# Altium PCB pcb_v2.PcbDoc
Units mil, origin at the board's own origin, x right, y up, seen from the top; angles counter-clockwise.
Board outline 1050 x 1050 mil, 4 copper layers (Top Layer, Layer 1, Layer 2, Bottom Layer), stack 61.855 mil thick; 57 components, 65 nets, 223 pads, 109 vias.
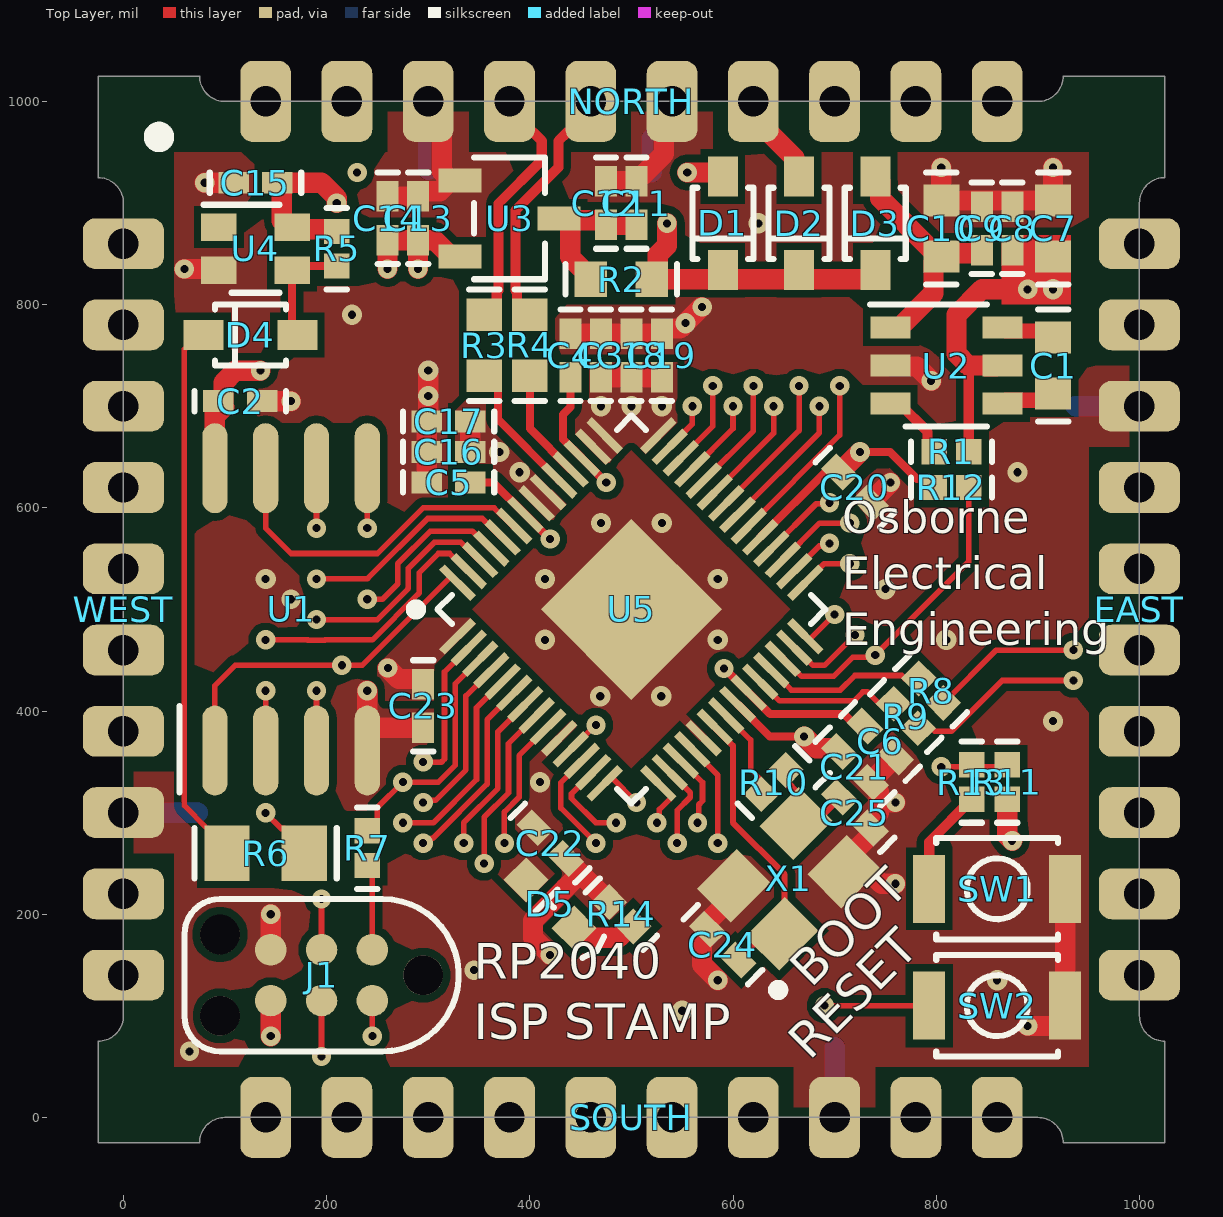
[diagram p0: Top Layer view]
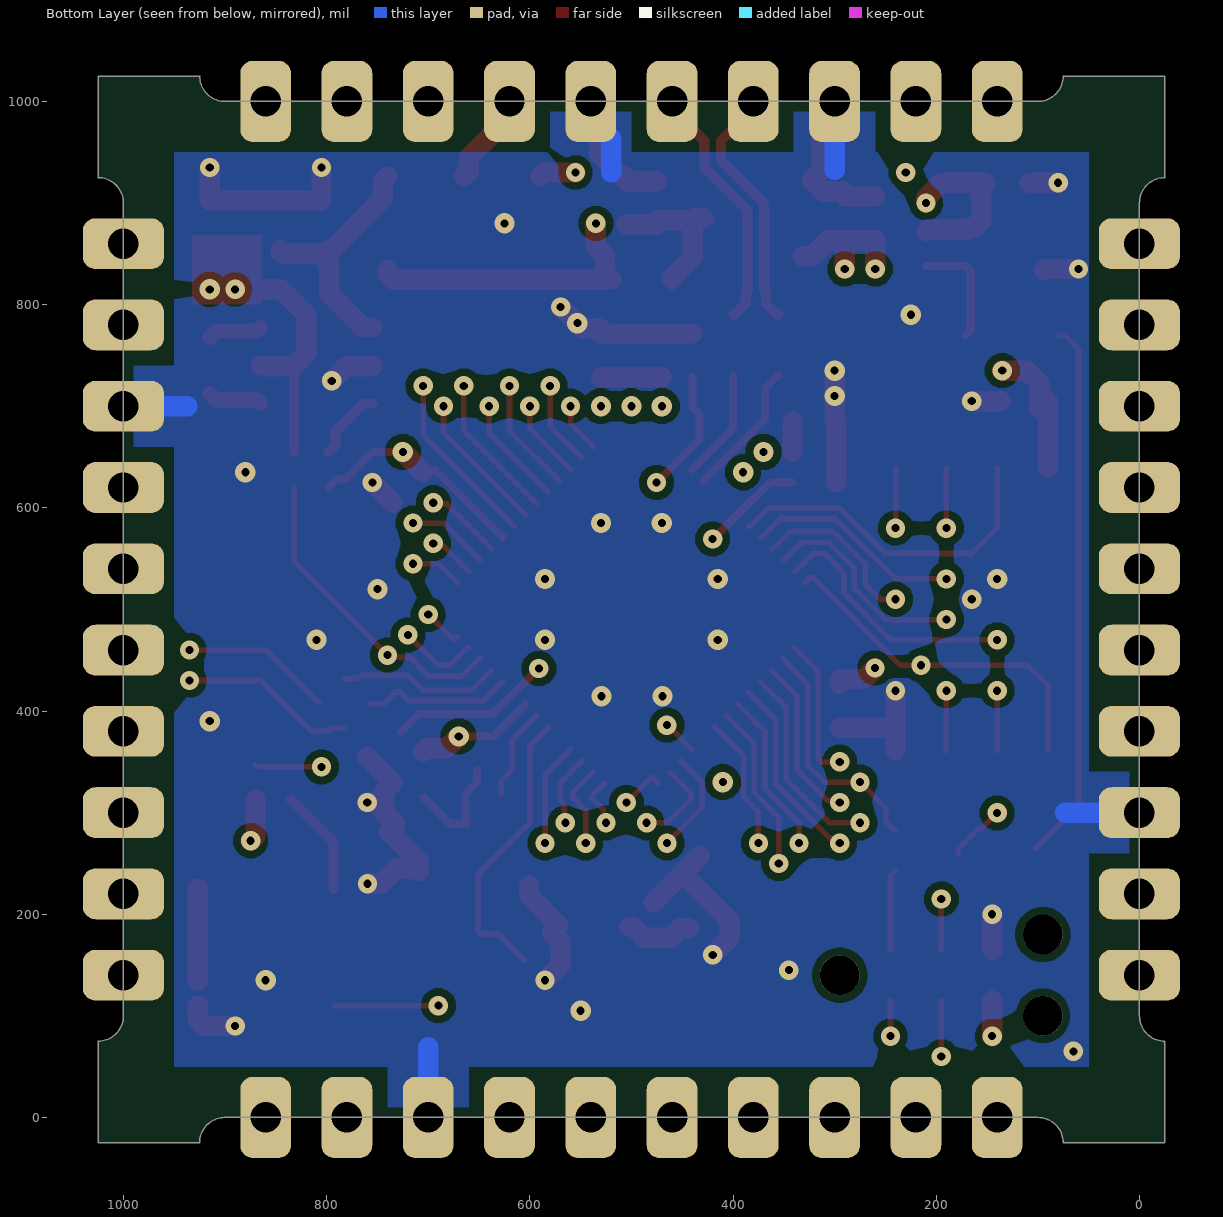
[diagram p1: Bottom Layer view, seen from below]
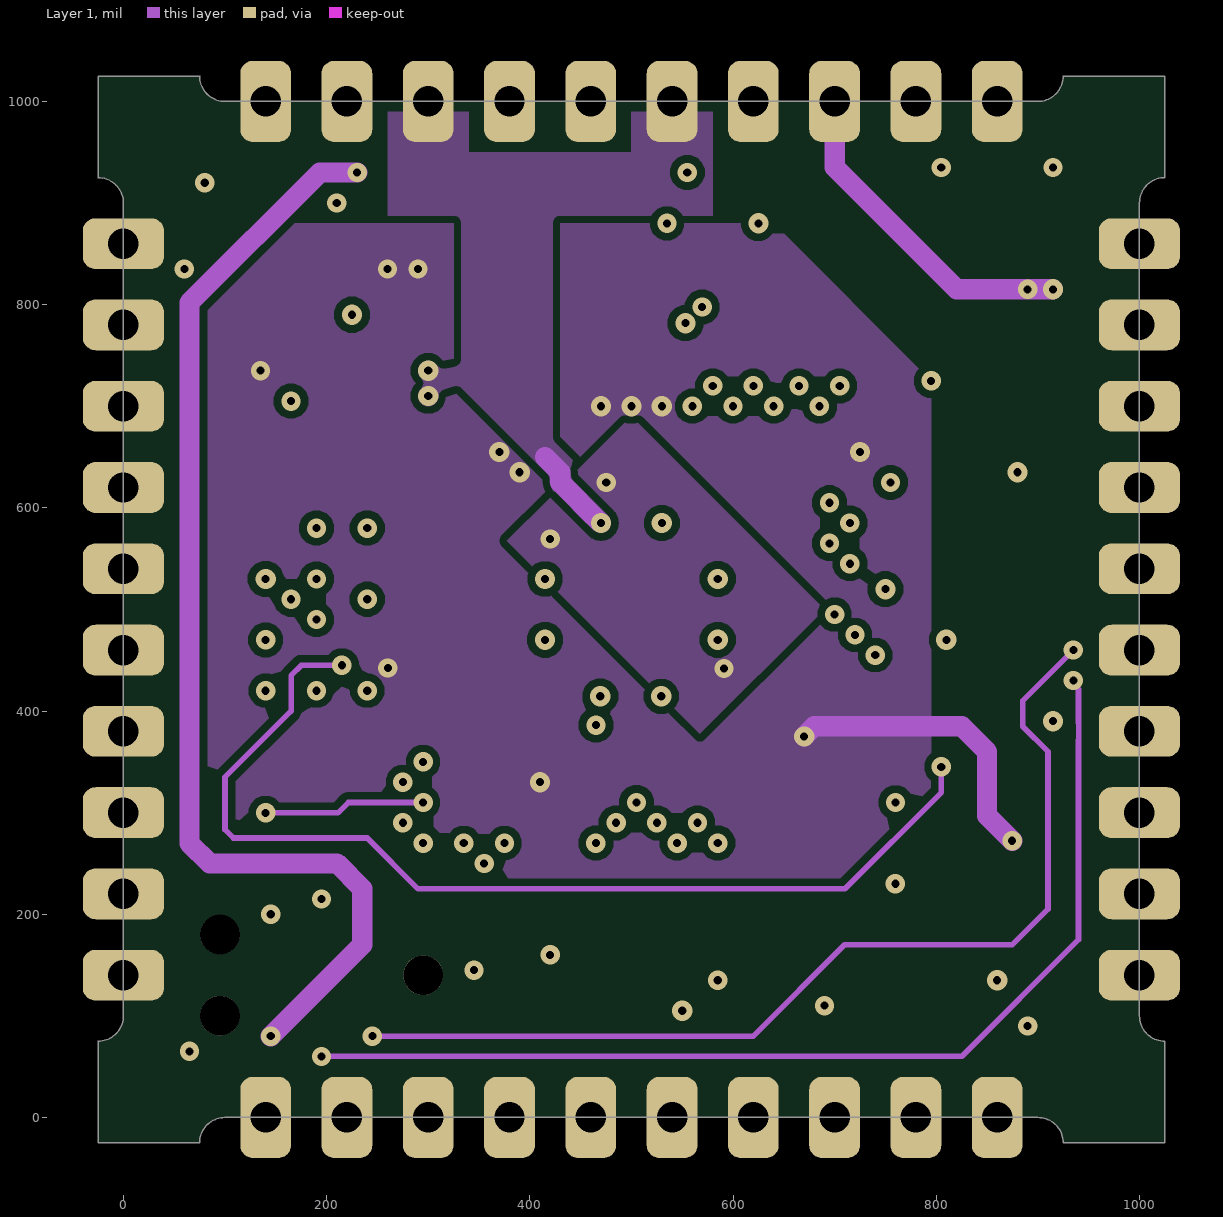
[diagram p2: Layer 1]
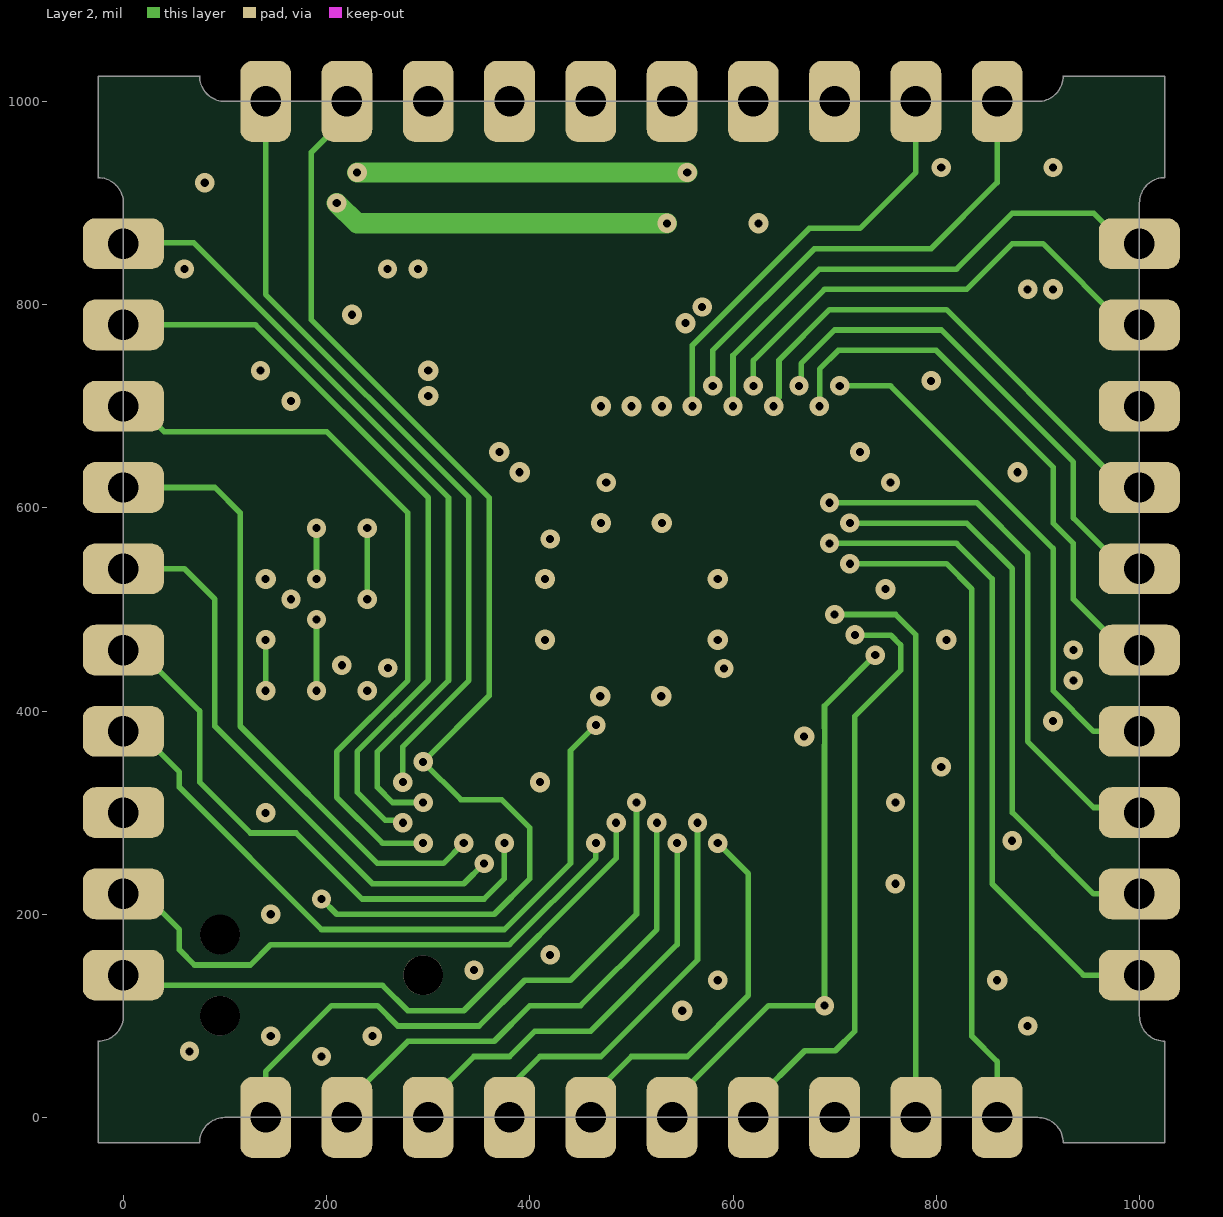
[diagram p3: Layer 2]
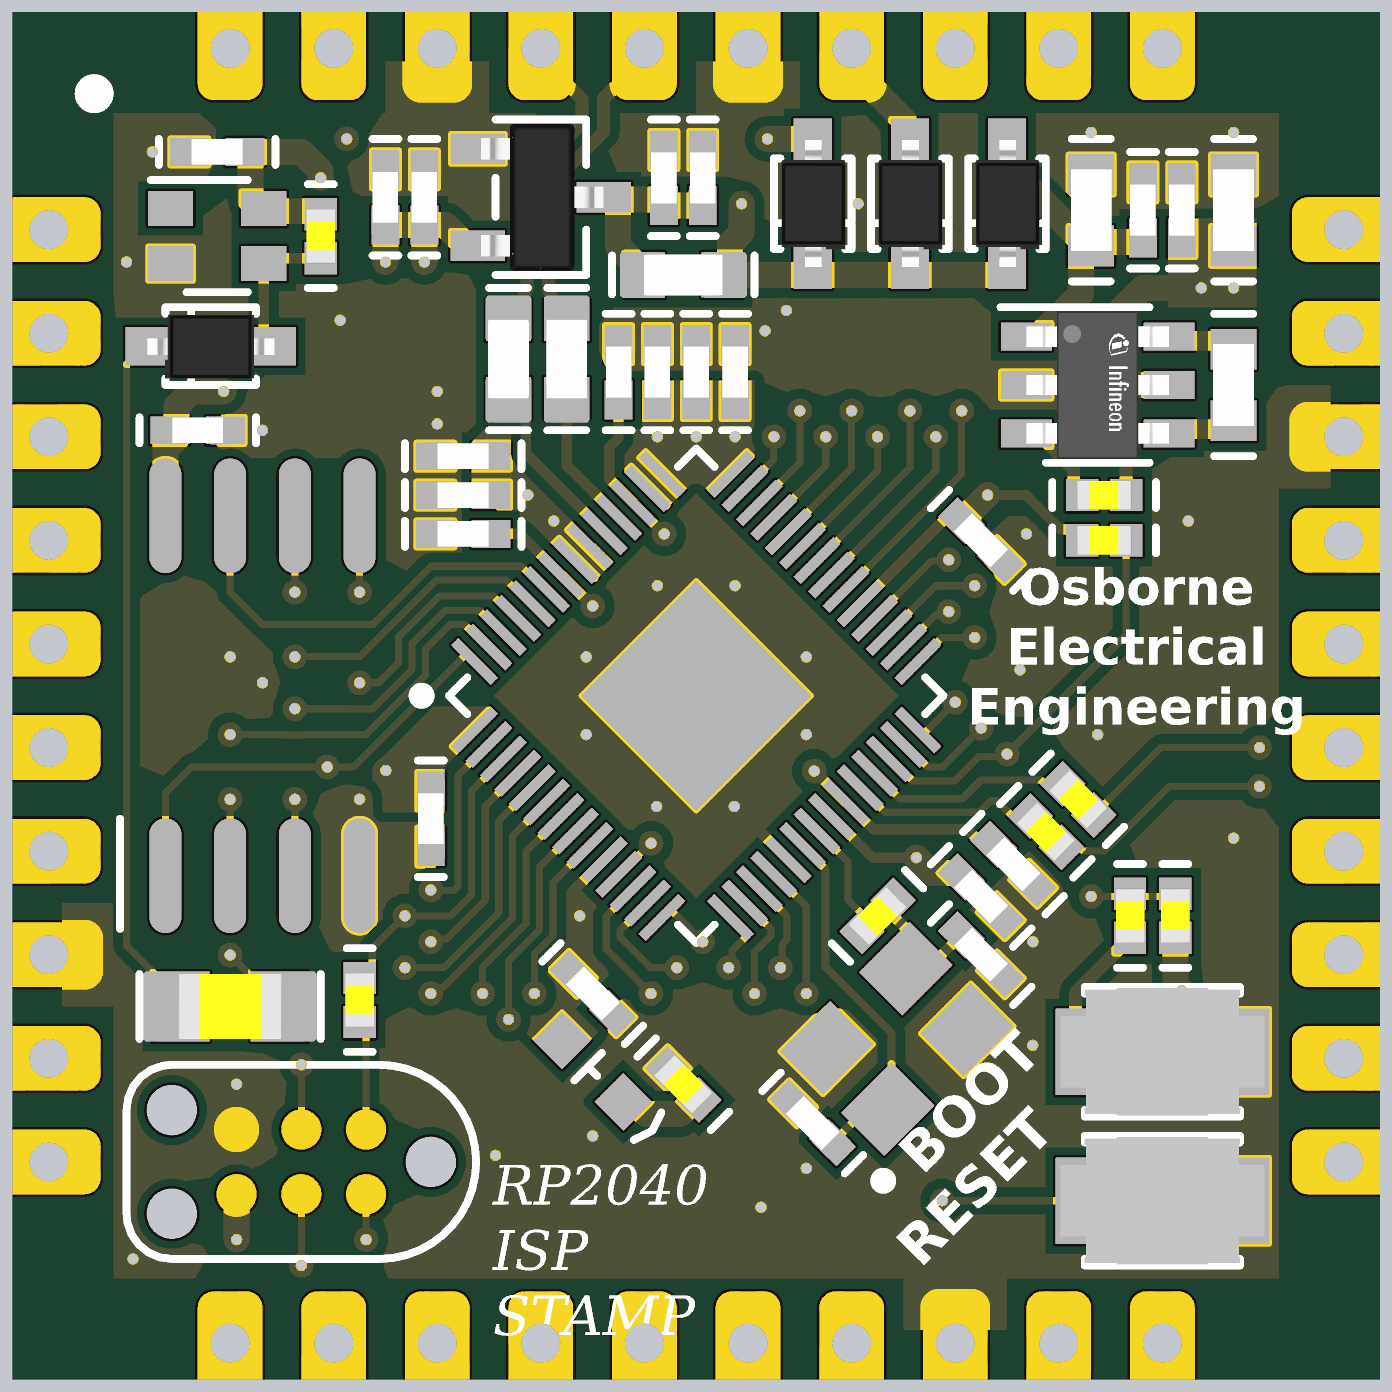
[diagram p4: 3D render of the assembled board from above, using the file's embedded part models]

## Layer stack, top to bottom
Top Solder: solder mask 0.5, Solder Resist, Dk 3.8
Top Layer: signal copper 1.4
Dielectric 2: prepreg 7.874, 7628, Dk 4.6
Layer 1: signal copper 0.689
Dielectric 1: core 41.9291, 7628, Dk 4.6
Layer 2: signal copper 0.689
Dielectric 3: prepreg 7.874, 7628, Dk 4.6
Bottom Layer: signal copper 1.4
Bottom Solder: solder mask 0.5, Solder Resist, Dk 3.8

## Board outline
-25,-25 -25,75 ccw(c-25,100) 0,100 0,900 ccw(c-25,900) -25,925 -25,1025 75,1025 ccw(c100,1025) 100,1000 900,1000 ccw(c900,1025) 925,1025 1025,1025 1025,925 ccw(c1025,900) 1000,900 1000,100 ccw(c1025,100) 1025,75 1025,-25 925,-25 ccw(c900,-25) 900,0 100,0 ccw(c100,-25) 75,-25

## Design rules (kind name [scope] priority, off if disabled: settings)
BoardOutlineClearance [Not HasFootprint('CASTELLATIONS')] p1: gap=10 ignorepadtopadclearanceinfootprint=FALSE except(0: Track-OutlineEdge)
Clearance [All] p1: gap=7.5 ignorepadtopadclearanceinfootprint=FALSE except(5: Arc-Arc Arc-Track Track-Track)
ComponentClearance [All] p1: gap=10 collisioncheckmode=3 verticalgap=100000 showdistances=TRUE donotcheckwithout3dbody=TRUE
DiffPairsRouting Netclass_90ohm [InDifferentialPairClass('90ohm')] p1: maxlimit=20 minlimit=6.5 mostfreqgap=20 toplayer_maxgap=6.5 toplayer_prefgap=6.5 toplayer_minwidth=10 toplayer_maxwidth=10 toplayer_prefwidth=10 midlayer2_mingap=9 midlayer2_maxgap=9 midlayer2_prefgap=9 midlayer2_minwidth=8 midlayer2_maxwidth=8 midlayer2_prefwidth=8 impedanceprofiledriven=TRUE impedanceprofileid={C649F7BD-3770-45B3-A50B-245186EF4A6F} impedanceprofilevalue=90.000000 maxuncoupledlength=500
DiffPairsRouting Default_DiffPair [All] p2: maxlimit=10 minlimit=10 mostfreqgap=10 toplayer_minwidth=15 toplayer_maxwidth=15 toplayer_prefwidth=15 midlayer1_minwidth=15 midlayer1_maxwidth=15 midlayer1_prefwidth=15 midlayer2_minwidth=15 midlayer2_maxwidth=15 midlayer2_prefwidth=15 bottomlayer_minwidth=15 bottomlayer_maxwidth=15 bottomlayer_prefwidth=15 maxuncoupledlength=500
HoleSize [All] p1: absolutevalues=TRUE maxlimit=200 minlimit=8 maxpercent=80.000 minpercent=20.000
MinimumAnnularRing [All] p1: minimumring=5.5
MinimumSolderMaskSliver [All] p1: minsoldermaskwidth=3.94
PolygonConnect [All] p1: connectstyle=Direct reliefconductorwidth=20 reliefentries=4 polygonreliefangle="90 Angle" airgapwidth=10
RoutingVias [All] p1: holewidth=8 width=20 viastyle="Through Hole" minholewidth=8 minwidth=19 maxholewidth=35 maxwidth=70
SilkToSilkClearance [All] p1: silktosilkclearance=4
SilkToSolderMaskClearance [IsPad] p1: minsilkscreentomaskgap=3.5 clearancetoexposedcopper=FALSE
SolderMaskExpansion [All] p1: expansion=1.97 istentingtop=FALSE
UnRoutedNet [All] p1: checkbadconnections=TRUE
Width Default_Width [All] p1: maxlimit=100 minlimit=3.5 preferedwidth=10
23 further rules are at their usual default settings.

## Classes and differential pairs
differential pair class 90ohm: USB_EXT
differential pair USB_EXT: +USB_EXT_P -USB_EXT_N

## Components (designator, comment, footprint, x,y, rotation, side; value= is the part's Value field where it differs from the comment)
C1 "2.2uF" C0603 915,740 r270 top
C2 "100nF" C0402 115,705 r180 top
C3 "1uF" C0402 470,750 r270 top
C4 "1uF" C0402 440,750 r270 top
C5 "100nF" C0402 320,625 r0 top
C6 "100nF" C0402 745,370 r135 top
C7 "10uF" C0603 915,875 r270 top
C8 "100nF" C0402 875,875 r270 top
C9 "100nF" C0402 845,875 r270 top
C10 "10uF" C0603 805,875 r270 top
C11 "1uF" C0402 505,900 r270 top
C12 "100nF" C0402 475,900 r270 top
C13 "100nF" C0402 290,885 r270 top
C14 "1uF" C0402 260,885 r270 top
C15 "100nF" C0402 130,920 r0 top
C16 "100nF" C0402 320,655 r0 top
C17 "100nF" C0402 320,685 r0 top
C18 "100nF" C0402 500,750 r270 top
C19 "100nF" C0402 530,750 r270 top
C20 "100nF" C0402 720,620 r135 top
C21 "100nF" C0402 720,345 r135 top
C22 "100nF" C0402 420,270 r135 top
C23 "100nF" C0402 295,405 r90 top
C24 "33pF" C0402 590,170 r315 top
C25 "33pF" C0402 720,300 r135 top
D1 "1N5819WS" SOD-323_L1.8-W1.3-LS2.5-RD 590,880 r90 top
D2 "1N5819WS" SOD-323_L1.8-W1.3-LS2.5-RD 665,880 r90 top
D3 "1N5819WS" SOD-323_L1.8-W1.3-LS2.5-RD 740,880 r90 top
D4 "1N4148WS T4" SOD-323_L1.8-W1.3-LS2.5-RD 125,770 r0 top
D5 "19-217/GHC-YR1S2/3T" LED0603-R-RD 420,210 r135 top
EAST "STAMPEDGE" CASTELLATIONS 1000,500 r270 top locked
J1 "TC2030-IDC-NL" TC2030-IDC-NL 295,140 r180 top
NORTH "STAMPEDGE" CASTELLATIONS 500,1000 r0 top locked
R1 "10kΩ" R0402 815,655 r0 top
R2 "2.2Ω" R0603 490,825 r180 top
R3 "27Ω" R0603 355,760 r90 top
R4 "27Ω" R0603 400,760 r90 top
R5 "10kΩ" R0402 210,855 r90 top
R6 "0Ω" R0805 140,260 r0 top
R7 "100Ω" R0402 240,265 r270 top
R8 "100Ω" R0402 795,420 r315 top
R9 "100Ω" R0402 770,395 r315 top
R10 "1kΩ" R0402 640,330 r45 top
R11 "10kΩ" R0402 870,330 r270 top
R12 "10kΩ" R0402 815,620 r180 top
R13 "1kΩ" R0402 835,330 r90 top
R14 "220Ω" R0402 490,200 r315 top
SOUTH "STAMPEDGE" CASTELLATIONS 500,0 r180 top locked
SW1 "B3U-1000P" KEY-SMD_B3U-1000PM 860,225 r180 top
SW2 "B3U-1000P" KEY-SMD_B3U-1000PM 860,110 r180 top
U1 "W25Q128JVSIQTR" SOIC-8_L5.3-W5.3-P1.27-LS8.0-BL 165,500 r0 top locked
U2 "HX4002" SOT-23-6_L2.9-W1.6-P0.95-LS2.8-BR 810,740 r180 top
U3 "XC6206P332MR" SOT-23-3_L2.9-W1.6-P1.90-LS2.8-BR 380,885 r180 top
U4 "WS2812B-2020" LED-SMD_4P-L2.0-W2.0-TL_WS2812B-2020 130,855 r0 top
U5 "RP2040" LQFN-56_L7.0-W7.0-P0.4-EP 500,500 r45 top locked
WEST "STAMPEDGE" CASTELLATIONS 0,500 r90 top locked
X1 "12MHz" OSC-SMD_4P-L3.2-W2.5-BL 655,235 r45 top

## Footprints (in the part's own frame and the unit in brackets; to place one, negate y for a bottom-side part, rotate by r counter-clockwise, add the part's x,y. Pads: shape width x height; smd on the part's side, far side on the other; paste and mask are expansions set on the pad)
C0402 [mil]
  rect 30x21.5 smd: 1(-21.5,0) 2(21.5,0)
  silkscreen extent -45,-10 45,10, body extent -20,-10 20,10, height 5
C0603 [mm]
  rect 0.8x0.9 smd: 1(-0.7,0) 2(0.7,0)
  silkscreen extent -1.4,-0.38 1.4,0.38, body extent -0.8,-0.4 0.8,0.4, height 0.8
CASTELLATIONS [mil]
  rrect50% 50x80 hole 30 paste-100: 1(-360,0) 2(-280,0) 3(-200,0) 4(-120,0) 5(-40,0) 6(40,0) 7(120,0) 8(200,0) 9(280,0) 10(360,0)
KEY-SMD_B3U-1000PM [mm]
  rect 0.8x1.7 smd: 1(-1.7,0) 2(1.7,0)
  silkscreen extent -1.52,-1.27 1.52,1.27, body extent -2,-1.25 2,1.25, height 1.6
LED0603-R-RD [mm]
  rect 0.8x0.8 smd: 1(0.851,0) 2(-0.851,0)
  silkscreen extent -1.65,-0.38 0.13,0.38
LED-SMD_4P-L2.0-W2.0-TL_WS2812B-2020 [mil]
  rect 35x27 smd: 1(-36,21.3) 2(-36,-21.3) 3(36,-21.3) 4(36,21.3)
  silkscreen extent -51,-43 24,43, body extent -43,-39 43,39, height 33
LQFN-56_L7.0-W7.0-P0.4-EP [mm]
  rect 1.1x0.2 smd: 1(-3.55,2.6) 2(-3.55,2.2) 3(-3.55,1.8) 4(-3.55,1.4) 5(-3.55,1) 6(-3.55,0.6) 7(-3.55,0.2) 8(-3.55,-0.2) 9(-3.55,-0.6) 10(-3.55,-1) 11(-3.55,-1.4) 12(-3.55,-1.8) 13(-3.55,-2.2) 14(-3.55,-2.6) 29(3.55,-2.6) 30(3.55,-2.2) 31(3.55,-1.8) 32(3.55,-1.4) 33(3.55,-1) 34(3.55,-0.6) 35(3.55,-0.2) 36(3.55,0.2) 37(3.55,0.6) 38(3.55,1) 39(3.55,1.4) 40(3.55,1.8) 41(3.55,2.2) 42(3.55,2.6)
  rect 0.2x1.1 smd: 15(-2.6,-3.55) 16(-2.2,-3.55) 17(-1.8,-3.55) 18(-1.4,-3.55) 19(-1,-3.55) 20(-0.6,-3.55) 21(-0.2,-3.55) 22(0.2,-3.55) 23(0.6,-3.55) 24(1,-3.55) 25(1.4,-3.55) 26(1.8,-3.55) 27(2.2,-3.55) 28(2.6,-3.55) 43(2.6,3.55) 44(2.2,3.55) 45(1.8,3.55) 46(1.4,3.55) 47(1,3.55) 48(0.6,3.55) 49(0.2,3.55) 50(-0.2,3.55) 51(-0.6,3.55) 52(-1,3.55) 53(-1.4,3.55) 54(-1.8,3.55) 55(-2.2,3.55) 56(-2.6,3.55)
  rect 3.2x3.2 smd: 57(0,0)
  silkscreen extent -3.94,-3.43 3.43,3.94, body extent -3.5,-3.5 3.5,3.5, height 0.9
OSC-SMD_4P-L3.2-W2.5-BL [mm]
  rect 1.4x1.2 smd: 1(-1.1,-0.85) 2(1.1,-0.85) 3(1.1,0.85) 4(-1.1,0.85)
  silkscreen extent -2.29,-1.9 -2.03,-1.65, body extent -1.6,-1.3 1.6,1.3, height 0.76
R0402 [mil]
  rect 25x25 smd: 1(-17,0) 2(17,0)
  silkscreen extent -40,-10 40,10, body extent -21,-11 21,11, height 19
R0603 [mil]
  rect 32x35 smd: 1(-30,0) 2(30,0)
  silkscreen extent -55,-15 55,15, body extent -31,-16 31,16, height 19
R0805 [mil]
  rect 44.59x54.21 smd: 1(-38.04,0) 2(38.04,0)
  silkscreen extent -70,-25 70,25, body extent -40,-25 40,25, height 19
SOD-323_L1.8-W1.3-LS2.5-RD [mm]
  rect 1x0.75 smd: 1(-1.173,0) 2(1.173,0)
  silkscreen extent -0.89,-0.76 0.89,0.76, body extent -1.24,-0.64 1.25,0.61, height 0.88
SOIC-8_L5.3-W5.3-P1.27-LS8.0-BL [mm]
  oval 0.63x2.25 smd: 1(-1.905,-3.53) 2(-0.635,-3.53) 3(0.635,-3.53) 4(1.905,-3.53) 5(1.905,3.53) 6(0.635,3.53) 7(-0.635,3.53) 8(-1.905,3.53)
  silkscreen extent -2.79,-4.57 -2.79,-2.41, body extent -2.67,-2.29 2.64,2.29, height 2.16
SOT-23-3_L2.9-W1.6-P1.90-LS2.8-BR [mm]
  rect 1.07x0.6 smd: 1(1.235,-0.95) 2(1.235,0.95) 3(-1.235,0)
  silkscreen extent -0.89,-1.52 0.89,1.52, body extent -1.23,-1.45 1.17,1.45, height 0.96
SOT-23-6_L2.9-W1.6-P0.95-LS2.8-BR [mm]
  rect 1x0.55 smd: 1(1.4,-0.95) 2(1.4,0) 3(1.4,0.95) 4(-1.4,0.95) 5(-1.4,0) 6(-1.4,-0.95)
  silkscreen extent -1.02,-1.52 1.91,1.52, body extent -1.4,-1.45 1.4,1.45, height 1.26
TC2030-IDC-NL [mil] "Tag Connect 6-Pin No Legs"
  round 38.9 hole 39 unplated: 0(0,0) 0(200,-40) 0(200,40)
  round 31 smd paste-100: 1(50,-25) 2(50,25) 3(100,-25) 4(100,25) 5(150,-25) 6(150,25)
  silkscreen extent -35,-75 235,75

## Part data
C1: "16V 2.2uF X5R ±10% 0603  Multilayer Ceramic Capacitors MLCC - SMD/SMT ROHS", BOM_JLCPCB Part Class="Basic Part", BOM_Manufacturer=SAMSUNG, BOM_Manufacturer Part=CL10A225KO8NNNC, BOM_Supplier=LCSC, BOM_Supplier Part=C23630, nameAlias=Capacitance, spicePre=C, spiceSymbolName=CL10A225KO8NNNC
C2 C5 C6 C8 C9 C12 C13 C15 C16 C17 C18 C19 C20 C21 C22 C23: "16V 100nF X7R ±10% 0402  Multilayer Ceramic Capacitors MLCC - SMD/SMT ROHS", BOM_JLCPCB Part Class="Basic Part", BOM_Manufacturer=SAMSUNG, BOM_Manufacturer Part=CL05B104KO5NNNC, BOM_Supplier=LCSC, BOM_Supplier Part=C1525, nameAlias=Capacitance, spicePre=C, spiceSymbolName=CL05B104KO5NNNC
C3 C4 C11 C14: "25V 1uF X5R ±10% 0402  Multilayer Ceramic Capacitors MLCC - SMD/SMT ROHS", BOM_JLCPCB Part Class="Basic Part", BOM_Manufacturer=SAMSUNG, BOM_Manufacturer Part=CL05A105KA5NQNC, BOM_Supplier=LCSC, BOM_Supplier Part=C52923, nameAlias=Capacitance, spicePre=C, spiceSymbolName=CL05A105KA5NQNC
C7 C10: "X5R 25V ±20% 10uF 0603 Multilayer Ceramic Capacitors MLCC - SMD/SMT ROHS", BOM_JLCPCB Part Class="Basic Part", BOM_Manufacturer=SAMSUNG, BOM_Manufacturer Part=CL10A106MA8NRNC, BOM_Supplier=LCSC, BOM_Supplier Part=C96446, nameAlias=Capacitance, spicePre=C, spiceSymbolName=CL10A106MA8NRNC
C24 C25: "50V 33pF C0G ±5% 0402  Multilayer Ceramic Capacitors MLCC - SMD/SMT ROHS", BOM_JLCPCB Part Class="Basic Part", BOM_Manufacturer=FH, BOM_Manufacturer Part=0402CG330J500NT, BOM_Supplier=LCSC, BOM_Supplier Part=C1562, nameAlias=Capacitance, spicePre=C, spiceSymbolName=0402CG330J500NT
D1 D2 D3: "40V 600mV@1A 1A SOD-323  Schottky Barrier Diodes (SBD) ROHS", BOM_JLCPCB Part Class="Basic Part", BOM_Manufacturer="Guangdong Hottech", BOM_Manufacturer Part=1N5819WS, BOM_Supplier=LCSC, BOM_Supplier Part=C191023, Contributor=LCSC, spicePre=D, spiceSymbolName=1N5819WS
D4: "100V +150℃@(Tj) 200mW Single 1.25V@150mA 4ns 1μA@75V 150mA SOD-323  Switching Diode ROHS", BOM_JLCPCB Part Class="Basic Part", BOM_Manufacturer=CJ, BOM_Manufacturer Part="1N4148WS T4", BOM_Supplier=LCSC, BOM_Supplier Part=C2128, spicePre=D, spiceSymbolName="1N4148WS T4"
D5: "20mA 285mcd 3.3V 518nm Colorless transparence -40℃~+85℃ 520nm~535nm Emerald 120° 110mW 0603  Light Emitting Diodes (LED) ROHS", BOM_JLCPCB Part Class="Basic Part", BOM_Manufacturer=EVERLIGHT, BOM_Manufacturer Part=19-217/GHC-YR1S2/3T, BOM_Supplier=LCSC, BOM_Supplier Part=C72043, spicePre=L, spiceSymbolName=19-217/GHC-YR1S2/3T
EAST NORTH SOUTH WEST: "RP2040 ISP Stamp Castellations"
J1: "Tag-Connect 6-Pin No Legs"
R1 R5 R11 R12: "1/16W Thick Film Resistors 50V ±1% ±100ppm/℃ -55℃~+155℃ 10kΩ 0402  Chip Resistor - Surface Mount ROHS", BOM_JLCPCB Part Class="Basic Part", BOM_Manufacturer=UniOhm, BOM_Manufacturer Part=0402WGF1002TCE, Resistance (Ohms)=10K, BOM_Supplier=LCSC, BOM_Supplier Part=C25744, nameAlias=Resistance, spicePre=R, spiceSymbolName=0402WGF1002TCE
R2: "1/10W Thick Film Resistors 75V ±1% ±400ppm/℃ -55℃~+155℃ 2.2Ω 0603  Chip Resistor - Surface Mount ROHS", BOM_JLCPCB Part Class="Basic Part", BOM_Manufacturer=UniOhm, BOM_Manufacturer Part=0603WAF220KT5E, Resistance (Ohms)=2.2, BOM_Supplier=LCSC, BOM_Supplier Part=C22939, nameAlias=Resistance, spicePre=R, spiceSymbolName=0603WAF220KT5E
R3 R4: "1/10W Thick Film Resistors 75V ±1% ±200ppm/℃ -55℃~+155℃ 27Ω 0603  Chip Resistor - Surface Mount ROHS", BOM_JLCPCB Part Class="Basic Part", BOM_Manufacturer=UniOhm, BOM_Manufacturer Part=0603WAF270JT5E, Resistance (Ohms)=27, BOM_Supplier=LCSC, BOM_Supplier Part=C25190, nameAlias=Resistance, spicePre=R, spiceSymbolName=0603WAF270JT5E
R6: "125mW Thick Film Resistors 150V ±1% ±800ppm/℃ -55℃~+155℃ 0mΩ 0805  Chip Resistor - Surface Mount ROHS", BOM_JLCPCB Part Class="Basic Part", BOM_Manufacturer=UniOhm, BOM_Manufacturer Part=0805W8F0000T5E, Resistance (Ohms)=0, BOM_Supplier=LCSC, BOM_Supplier Part=C17477, nameAlias=Resistance, spicePre=R, spiceSymbolName=0805W8F0000T5E
R7 R8 R9: "1/16W Thick Film Resistors 50V ±1% ±200ppm/℃ -55℃~+155℃ 100Ω 0402  Chip Resistor - Surface Mount ROHS", BOM_JLCPCB Part Class="Basic Part", BOM_Manufacturer=UniOhm, BOM_Manufacturer Part=0402WGF1000TCE, Resistance (Ohms)=100, BOM_Supplier=LCSC, BOM_Supplier Part=C25076, nameAlias=Resistance, spicePre=R, spiceSymbolName=0402WGF1000TCE
R10 R13: "1/16W Thick Film Resistors 50V ±1% ±100ppm/℃ -55℃~+155℃ 1kΩ 0402  Chip Resistor - Surface Mount ROHS", BOM_JLCPCB Part Class="Basic Part", BOM_Manufacturer=UniOhm, BOM_Manufacturer Part=0402WGF1001TCE, Resistance (Ohms)=1K, BOM_Supplier=LCSC, BOM_Supplier Part=C11702, nameAlias=Resistance, spicePre=R, spiceSymbolName=0402WGF1001TCE
R14: "1/16W Thick Film Resistors 50V ±1% ±100ppm/℃ -55℃~+155℃ 220Ω 0402  Chip Resistor - Surface Mount ROHS", BOM_JLCPCB Part Class="Basic Part", BOM_Manufacturer=UniOhm, BOM_Manufacturer Part=0402WGF2200TCE, Resistance (Ohms)=220, BOM_Supplier=LCSC, BOM_Supplier Part=C25091, nameAlias=Resistance, spicePre=R, spiceSymbolName=0402WGF2200TCE
SW1 SW2: "2.5mm 1.6mm Round Button 50mA Brick nogging 3mm SPST 12V SMD,3x2.5x1.6mm  Tactile Switches ROHS", BOM_JLCPCB Part Class="Extended Part", BOM_Manufacturer="Omron Electronics", BOM_Manufacturer Part=B3U-1000P, BOM_Supplier=LCSC, BOM_Supplier Part=C231329, Contributor=LCSC, spicePre=S, spiceSymbolName=B3U-1000P
U1: "SOIC-8_208mil  NOR FLASH ROHS", BOM_JLCPCB Part Class="Basic Part", BOM_Manufacturer=WINBOND, BOM_Manufacturer Part=W25Q128JVSIQTR, BOM_Supplier=LCSC, BOM_Supplier Part=C97521, spicePre=U, spiceSymbolName=W25Q128JVSIQTR
U2: "NO Charge pump 1 5V 2.7V~5.5V 250mA 1.2MHz SOT-23-6  DC-DC Converters ROHS", BOM_JLCPCB Part Class="Extended Part", BOM_Manufacturer=HEXIN, BOM_Manufacturer Part=HX4002, BOM_Supplier=LCSC, BOM_Supplier Part=C172354, Contributor=LCSC, spicePre=U, spiceSymbolName=HX4002
U3: "200mA 680mV@(100mA) Fixed 3.3V~3.3V Positive 1 6V SOT-23-3L  Linear Voltage Regulators (LDO) ROHS", BOM_JLCPCB Part Class="Basic Part", BOM_Manufacturer=TOREX, BOM_Manufacturer Part=XC6206P332MR, BOM_Supplier=LCSC, BOM_Supplier Part=C5446, spicePre=U, spiceSymbolName=XC6206P332MR
U4: "5mA 5.3V -25℃~+85℃ RGB SMD,2x2mm  Light Emitting Diodes (LED) ROHS", BOM_JLCPCB Part Class="Extended Part", BOM_Manufacturer=Worldsemi, BOM_Manufacturer Part=WS2812B-2020, BOM_Supplier=LCSC, BOM_Supplier Part=C965555, Contributor=LCSC, spicePre=L, spiceSymbolName=WS2812B-2020
U5: "ARM Cortex-M0 1@x4ch/12bit USB Host/Device 2 264KB 2 133MHz 30 2 QFN-56(7x7)  Microcontroller Units (MCUs/MPUs/SOCs) ROHS", BOM_JLCPCB Part Class="Extended Part", BOM_Manufacturer="Raspberry Pi(树莓派)", BOM_Manufacturer Part=RP2040, BOM_Supplier=LCSC, BOM_Supplier Part=C2040, Contributor=LCSC, spicePre=U, spiceSymbolName=RP2040
X1: "12MHz SMD Crystal Resonator 20pF ±10ppm ±30ppm -40℃~+85℃ SMD3225-4P  Crystals ROHS", BOM_JLCPCB Part Class="Basic Part", BOM_Manufacturer=YXC, BOM_Manufacturer Part=X322512MSB4SI, BOM_Supplier=LCSC, BOM_Supplier Part=C9002, nameAlias=Frequency, spicePre=X, spiceSymbolName=X322512MSB4SI

## Via types
v1: diameter 19, hole 8, Top Layer to Bottom Layer, tented both sides, 80 vias
v2: diameter 20, hole 8, Top Layer to Bottom Layer, tented both sides, 29 vias

## Nets (pads, with @x,y where several pads share a name; then routed paths per layer and width w, separated by ;. In a path a pad name is that pad's centre, name@x,y a point inside that pad or via, vN(x,y) a via of type N, cw(c..) or ccw(c..) an arc to the next point about the centre after c; other vN are vias at no path point)
1V1: C4.2 C5.2 C6.2 U5.23 U5.45 U5.50 | length 387.5
  Top Layer w8: C5.2 363.86,625 U5.50 395.69,593.26 419.64,569.32 v1(420.03,569.32) ; C4.2 440,699.08 432.82,691.9 432.82,667.49 451.28,649.03 U5.45 ; U5.45@450.09,650 475.11,624.98 v1(475.24,624.98) ; v1@591.5,441.82 U5.23@615.44,417.88 ; U5.23 615.62,417.88 636.58,396.91 709.3,396.91 C6.2@726.21,380
  other v1: 591.1,441.82
3V3: C2.2 C3.2 C13.2 C14.2 C16.2 C17.2 C18.2 C19.2 C20.2 C21.2 C22.2 C23.2 D5.1 R11.2 R12.2 U1.8 U3.2 U5.1 U5.10 U5.22 U5.33 U5.42 U5.43 U5.44 U5.48 U5.49 | length 1079.7
  Top Layer w8: U5.22 636.14,375 v2(670,375) ; U5.33 C20.2@693.07,637.39 ; v2(725,655) 754.7,655 781.2,628.5 789.5,628.5 R12.2
  Top Layer w20: U1.8 90,690 ; C2.2@99.25,699.25 90,690 ; v1(135,735) 110.22,735 98.5,723.28 98.5,705.75 97.75,705 C2.2 90.75,705 90,704.25 90,690 ; v1(260,835) C14.2 C13.2 ; v1(260.25,442.32) 271.07,431.5 294.25,431.5 295,430.75 C23.2 ; v1(290,835) C13.2 ; U3.2 322.13,847.6 306.23,863.5 C13.2 ; C16.2 C17.2 ; C3.2 C18.2 C19.2 ; v2(670,375) 681.79,363.21 701.79,363.21 C21.2 ; C20.2 705.2,635.2 v2(725,655) ; R11.2 870,277.07 v1(874.75,272.32)
  Layer 1 w20: v2(670,375) 680,385 825,385 850,360 850,297.07 v1(874.75,272.32)
  other v2: 410,330 390,635 370,655 470,700 500,700 530,700
3V3_EXT: C7.2 C8.2 NORTH.8 R1.2 U2.5 | length 602.8
  Top Layer w10: R1.2 832,740 ; U2.5@848.5,734.17 859.3,734.17 U2.5
  Top Layer w20: U2.5 832,740 831.73,740 820.02,751.71 820.02,790.02 845,815 v1(890,815) v1@890.44,815
  Layer 1 w20: NORTH.8 700,935 820,815 v1(890,815) v2(915,815)
5V: C15.2 D1.1 D2.1 D3.1 R2.1 R5.2 U4.4 | length 786.6
  Top Layer w20: C15.2 C15.2@155,920 ; R5.2 207.85,874.15 168.15,874.15 U4.4 162,876.3 155.75,882.55 155.75,919.25 C15.2@155,920 ; v1(210,900) 210,905 195,920 C15.2@155,920 ; v1(535,880) 535,858 526,849 526,831 R2.1 735.24,825 740,829.76 D3.1
  Layer 2 w20: v1(210,900) 230,880 v1(535,880)
5V_DBG: D1.2 J1.6 | length 1517.6
  Top Layer w20: v1(145,80) J1.6 ; v1(555,930) 586.16,930 D1.2
  Layer 1 w20: v1(145,80) 235,170 235,225.28 210.28,250 85,250 65,270 65,801.82 193.18,930 v1(230,930)
  Layer 2 w20: v1(230,930) v1(555,930)
5V_EXT: D2.2 NORTH.7 | length 92.5
  Top Layer w20: NORTH.7 620,985 660.24,944.76 660.24,930.93 D2.2
GND: C2.1 C3.1 C4.1 C5.1 C6.1 C7.1 C8.1 C9.1 C10.1 C11.1 C12.1 C13.1 C14.1 C15.1 C16.1 C17.1 C18.1 C19.1 C20.1 C21.1 C22.1 C23.1 C24.1 C25.1 EAST.3 J1.5 NORTH.3 NORTH.6 R14.1 SOUTH.3 SW1.1 SW2.1 U1.4 U2.2 U3.1 U4.2 U5.19 U5.57 WEST.3 X1.2 X1.4 | length 2133
  Top Layer w20: v1(60,835) 92.7,835 U4.2 ; v1(80,920) C15.1 ; C2.1 v1(165,705) ; J1.5 v1(145,200) ; U1.4 U1.4@240,381.28 ; v1(240,420) U1.4@240,381.28 ; C14.1 C13.1 290,910.75 290.75,911.5 311.23,911.5 U3.1@322.13,922.4 ; C23.1 242.22,383.5 U1.4@240,381.28 ; C5.1 C16.1 C17.1 299.25,685 300,685.75 v2(300,710) v2(300,735) ; NORTH.3 313.46,986.54 313.46,931.08 U3.1@322.13,922.4 ; U3.1@320.75,924.21 322.56,922.4 U3.1@322.13,922.4 ; v1(420,160) 403.11,176.89 403.11,193.46 449.82,240.18 ; C22.1@432.5,257.5 449.82,240.18 ; C4.1 C3.1 C18.1 C19.1 530,775.75 530.75,776.5 547.86,776.5 v2(553.18,781.82) v1@568.93,797.57 ; C12.1 C11.1 ; R14.1 449.82,240.18 ; C11.1@505.75,922.25 505.75,926.5 510,926.5 531.7,948.2 531.7,986.7 NORTH.6@545,1000 ; C24.1 C24.1@571.79,188.21 ; v1(585,135) 569.49,150.51 569.49,172.83 577.8,181.14 577.8,182.2 C24.1@571.79,188.21 ; X1.4 600.72,218.19 571.79,189.27 C24.1@571.79,188.21 ; C20.1 735.2,605.2 v1(755,625) ; U2.2 755.71,739.17 780.83,739.17 v1(795,725) ; v1(759.82,230) 746.08,230 731.33,244.74 712.07,244.74 X1.2 709.28,251.81 738.21,280.73 732.2,286.74 732.2,288.86 743.36,300.02 743.36,310 ; v1(760,310) 743.36,310 ; C6.1 C21.1 735.2,328.74 743.36,320.58 743.36,310 ; v1(805,935) C10.1 C7.1 v1(915,935) ; v1(890,90) 921.18,90 926.93,95.75 SW2.1 ; SW2.1@926.93,133.77 SW1.1
  Layer 1 w20: 415,650 430,635 430,625 v2(470,585)
  Bottom Layer w20: WEST.3@-2.21,300 73.23,300 ; 300,932.55 NORTH.3@300,1002.55 ; 520,930 520,963.65 545,988.65 NORTH.6@545,1000 ; SOUTH.3@700,3.36 700,69.04 ; 937.26,700 EAST.3@1001.88,700
  other v1: 65,65 345,145 165,510 569.64,797.57
  other v2: 550,105 860,135 915,390 469.37,414.48 529.37,414.48 415,470 585,470 810,470 750,520 140,530 415,530 585,530 530,585 880,635 225,790 625,880
GPIO0TX: J1.3 NORTH.2 U5.2 | length 1363.7
  Top Layer w5.5: J1.3 v1(195,215) ; v1(295,350) 295.47,349.53 312.78,349.53 316,352.75 316,438.49 U5.2
  Layer 2 w5.5: v1(195,215) 210,200 365,200 400,235 400,285 372.2,312.8 332.2,312.8 v1(295,350) 360,415 360,610 185,785 185,950 220,985 NORTH.2
GPIO1RX: NORTH.1 R7.1 U5.3 | length 1015.6
  Top Layer w5.5: R7.1 249.75,291.75 249.75,304.75 v1(275,330) 310,330 326.5,346.5 326.5,426.72 U5.3
  Layer 2 w5.5: NORTH.1 140,810 340,610 340,430 275,365 v1(275,330)
GPIO2LED: R6.2 U5.4 WEST.10 | length 1170.2
  Top Layer w5.5: v1(140,299.73) 155.38,284.36 158.5,284.36 178.04,264.81 R6.2 ; v1(295,310) 297.05,312.05 307.05,312.05 337,342 337,414.95 U5.4
  Layer 1 w5.5: v1(140,299.73) 211.2,299.73 221.47,310 v1(295,310)
  Layer 2 w5.5: WEST.10@-0.71,860.71 69.29,860.71 320,610 320,430 250,360 250,325 265,310 v1(295,310)
GPIO3: U5.5 WEST.9 | length 948.3
  Top Layer w5.5: v1(275,290) 305,290 347.5,332.5 347.5,403.18 U5.5
  Layer 2 w5.5: WEST.9@-4.26,780 130,780 300,610 300,430 230,360 230,320.15 257.57,292.58 272.42,292.58 v1(275,290)
GPIO4: U5.6 WEST.8 | length 923.9
  Top Layer w5.5: v1(295,270) 298.65,270 303.28,274.63 304.48,274.63 358,328.15 358,391.41 U5.6
  Layer 2 w5.5: WEST.8 15,700 40,675 200,675 280,595 280,430 210,360 210,315 255,270 v1(295,270)
GPIO5: U5.7 WEST.7 | length 781.4
  Top Layer w5.5: v1(335,270) 335,290.3 368.5,323.8 368.5,379.64 U5.7
  Layer 2 w5.5: WEST.7 90,620 115,595 115,385 250,250 315,250 v1(335,270)
GPIO6: U5.8 WEST.6 | length 731.9
  Top Layer w5.5: v1(355,250) 355,295.45 379,319.45 379,367.86 U5.8
  Layer 2 w5.5: WEST.6 60,540 90,510 90,385 245,230 335,230 v1(355,250)
GPIO7: U5.9 WEST.5 | length 693
  Top Layer w5.5: v1(375,270) 375,300.6 389.5,315.1 389.5,356.09 U5.9
  Layer 2 w5.5: WEST.5 15,460 75,400 75,330 125.02,279.98 170.02,279.98 235,215 355,215 375,235 v1(375,270)
GPIO8: U5.11 WEST.4 | length 737.8
  Top Layer w5.5: U5.11 440.66,362.2 464.57,386.11 v1(465.08,386.11)
  Layer 2 w5.5: WEST.4 15,380 55,340 55,325 195,185 375,185 440,250 440,361.03 v1(465.08,386.11)
GPIO9: U5.12 WEST.2 | length 668.1
  Top Layer w5.5: U5.12 451.28,350.29 430.52,329.53 430.52,304.48 v1(465,270)
  Layer 2 w5.5: WEST.2 20,220 55,185 55,165 70,150 125,150 145,170 380,170 465,255 v1(465,270)
GPIO10: U5.13 WEST.1 | length 685.3
  Top Layer w5.5: U5.13 441.02,318.53 441.02,313.98 465,290 v1(485,290)
  Layer 2 w5.5: WEST.1 10,130 255,130 280,105 335,105 485,255 v1(485,290)
GPIO11: SOUTH.10 U5.14 | length 644.5
  Top Layer w5.5: U5.14 479.04,334.28 480.72,334.28 v1(505,310)
  Layer 2 w5.5: SOUTH.10 140.03,45.03 205,110 250,110 270,90 350,90 395,135 440,135 505,200 v1(505,310)
GPIO12: SOUTH.9 U5.15 | length 589.3
  Top Layer w5.5: v1(525,290) 527.58,292.58 527.58,303.19 538.97,314.58 538.97,316.26 U5.15
  Layer 2 w5.5: SOUTH.9 SOUTH.9@220,15 ; v1(525,290) 525,185 450,110 400,110 365,75 280,75 SOUTH.9@220,15 ; SOUTH.9@220,15 220,20 SOUTH.9@220,25.03 ; SOUTH.9@220,25.03 220,35 210.03,25.03 SOUTH.9@220,25.03
GPIO13: SOUTH.8 U5.16 | length 507.9
  Top Layer w5.5: U5.16 557.86,319.65 557.86,315.09 545,302.23 v1(545,270)
  Layer 2 w5.5: SOUTH.8 300,15 345,60 380,60 405,85 460,85 545,170 v1(545,270)
GPIO14: SOUTH.7 U5.17 | length 479.9
  Top Layer w5.5: U5.17 570,329.78 570,311.49 566.26,307.75 566.26,291.26 v1(565,290)
  Layer 2 w5.5: SOUTH.7@365,0 365,15 410,60 470,60 565,155 v1(565,290)
GPIO15: SOUTH.6 U5.18 | length 483.5
  Top Layer w5.5: U5.18 585,337.05 v1(585,270)
  Layer 2 w5.5: SOUTH.6@455,0 455,15 500,60 555,60 615,120 615,240 v1(585,270)
GPIO16: SOUTH.4 U5.27 | length 671.3
  Top Layer w5.5: U5.27 661.43,462.42 678.85,445 690,445 v1(720,475)
  Layer 2 w5.5: SOUTH.4 620,15 670.62,65.62 700.62,65.62 720,85 720,395 765,440 765,465 755.25,474.75 720.25,474.75 v1(720,475)
GPIO17: SOUTH.2 U5.28 | length 584
  Top Layer w5.5: U5.28 674.04,470.72 675.72,470.72 v1(700,495)
  Layer 2 w5.5: v1(700,495) 760,495 780,475 780,36.51 787.35,29.16 SOUTH.2@794.16,29.16
GPIO18: SOUTH.1 U5.29 | length 714.7
  Top Layer w5.5: U5.29 689.78,545 v1(715,545)
  Layer 2 w5.5: v1(715,545) 810,545 835,520 835,80 860,55 SOUTH.1@860,-2.51
GPIO19: EAST.10 U5.30 | length 708.7
  Top Layer w5.5: U5.30 684.91,562.42 692.42,562.42 v1(695,565)
  Layer 2 w5.5: v1(695,565) 820,565 855,530 855,230 945,140 EAST.10@1005.68,140
GPIO20: EAST.9 U5.31 | length 657.9
  Top Layer w5.5: U5.31 685.22,585 v1(715,585)
  Layer 2 w5.5: v1(715,585) 830,585 875,540 875,300 955,220 EAST.9
GPIO21: EAST.8 U5.32 | length 615.6
  Top Layer w5.5: U5.32 681.92,603.97 693.97,603.97 v1(695,605)
  Layer 2 w5.5: v1(695,605) 840,605 890,555 890,370 954.97,305.03 994.97,305.03 EAST.8
GPIO22: EAST.7 U5.34 | length 714
  Top Layer w5.5: U5.34 705,671.59 v1(705,720)
  Layer 2 w5.5: v1(705,720) 755,720 915,560 915,420 954.97,380.03 EAST.7@984.97,380.03 ; EAST.7@1000,365 985,380 EAST.7
GPIO23: EAST.6 U5.35 | length 687.9
  Top Layer w5.5: U5.35 685,673.86 v1(685,700)
  Layer 2 w5.5: v1(685,700) 685.25,700.25 685.25,736.66 703.59,755 800,755 915,640 915,585 935,565 935,510 990,455 EAST.6@1000,455
GPIO24: EAST.5 U5.36 | length 642.3
  Top Layer w5.5: U5.36 665,676.14 v1(665,720)
  Layer 2 w5.5: v1(665,720) 667.05,722.05 667.05,742.05 700,775 805,775 935,645 935,590 980,545 EAST.5@1000,545
GPIO25: EAST.4 U5.37 | length 597.5
  Top Layer w5.5: U5.37 640,673.42 v1(640,700)
  Layer 2 w5.5: v1(640,700) 640,703.65 645.25,708.9 645.25,745.25 695,795 810,795 970,635 EAST.4@1000,635
GPIO26: EAST.2 U5.38 | length 599.4
  Top Layer w5.5: U5.38 620,675.66 v1(620,720)
  Layer 2 w5.5: v1(620,720) 620,745 690,815 830,815 875,860 905,860 985,780 EAST.2
GPIO27: EAST.1 U5.39 | length 599.2
  Top Layer w5.5: U5.39 600,677.95 v1(600,700)
  Layer 2 w5.5: v1(600,700) 600,750 685,835 820,835 875,890 955,890 985,860 EAST.1
GPIO28: NORTH.10 U5.40 | length 547.4
  Top Layer w5.5: U5.40 580,680.22 v1(580,720)
  Layer 2 w5.5: v1(580,720) 580,755 680,855 795,855 860,920 NORTH.10
GPIO29: NORTH.9 U5.41 | length 469.6
  Top Layer w5.5: U5.41 559.76,682.25 559.76,699.76 v1(560,700)
  Layer 2 w5.5: v1(560,700) 560,760 675,875 725,875 780,930 NORTH.9
NetC1_1: C1.1 U2.6 | length 54
  Top Layer w15: U2.6 868.45,774.07 908.49,774.07 C1.1
NetC1_2: C1.2 U2.4 | length 54
  Top Layer w15: U2.4 868.45,705.93 908.48,705.93 C1.2
NetC9_2: C9.2 C10.2 D3.2 U2.1 | length 248.5
  Top Layer w20: D3.2 744.76,921.4 744.76,904.58 796.15,853.19 799.25,853.19 C10.2 ; U2.1 763.74,777.39 797.28,810.94 797.28,841.7 803.03,847.45 C10.2 ; C9.2 845,851.22 844.25,850.47 808.03,850.47 C10.2
NetC11_2: C11.2 C12.2 R2.2 U3.3 | length 148
  Top Layer w20: U3.3 437.88,885 U3.3@439.69,883.19 ; R2.2 460,826.5 439.69,846.81 U3.3@439.69,883.19 ; C11.2 C12.2 475,882.44 474.25,883.19 U3.3@439.69,883.19
NetC25_2: C25.2 R10.2 X1.3 | length 111.7
  Top Layer w8: R10.2 652.02,330 663.47,318.55 663.47,290.8 X1.3 678.88,289.28 C25.2
NetD4_1: D4.1 R6.1 | length 533.2
  Top Layer w5.5: D4.1 73.92,770 60,756.08 60,306.96 82.41,284.54 82.41,284.36 101.77,265 R6.1@101.96,265
NetD4_2: D4.2 R5.1 U4.3 | length 111.6
  Top Layer w8: D4.2 166,775.16 U4.3 170.3,838 R5.1
NetD5_2: D5.2 R14.2 | length 66.9
  Top Layer w20: D5.2 451.82,186.31 461.29,176.84 487.35,176.84 498.49,187.98 R14.2
NetJ1_1: J1.1 R7.2 | length 80.1
  Top Layer w5.5: R7.2@240,243 245,238 J1.1
NetJ1_2: J1.2 R8.2 | length 1187.4
  Top Layer w5.5: v1(245,80) J1.2 ; R8.2 859.04,460 v1(935,460)
  Layer 1 w5.5: v1(245,80) 620,80 710,170 875,170 910,205 910,360 885,385 885,410 v1(935,460)
NetJ1_4: J1.4 R9.2 | length 1279.8
  Top Layer w5.5: v1(195,60) J1.4 ; R9.2 795.81,382.98 798.74,380.05 815.05,380.05 865,430 v1(935,430)
  Layer 1 w5.5: v1(195,60) 195.25,60.25 825.25,60.25 940,175 940,371.36 940.25,371.61 940.25,388.39 940,388.64 940,421.35 935,426.35 v1(935,430)
NetR1_1: R1.1 U2.3 | length 70.6
  Top Layer w10: U2.3 763.74,702.6 791.56,674.77 791.56,661.44 R1.1
NetR3_1: R3.1 U5.47 | length 134.9
  Top Layer w8: R3.1 356.5,730 368.5,718 368.5,687.18 U5.47
NetR4_1: R4.1 U5.46 | length 108.8
  Top Layer w8: R4.1 400,677.95 U5.46
NetR13_1: R13.1 SW1.2 | length 105.4
  Top Layer w10: SW1.2 793.07,271.07 R13.1
NetU1_2: U1.2 U5.55 | length 363.2
  Top Layer w5.5: U1.2 v1(140,420) ; v1(140,470) 181.36,470 181.61,469.75 198.39,469.75 198.64,470 245,470 290,515 290,515.15 291,516.15 291,536 310,555 321.05,555 338.47,537.58 U5.55
  Layer 2 w5.5: v1(140,420) v1(140,470)
NetU1_3: U1.3 U5.54 | length 340.5
  Top Layer w5.5: U1.3 v1(190,420) ; v1(190,490) 231.36,490 231.61,489.75 248.39,489.75 248.64,490 250,490 280,520 280,520.15 280.5,520.65 280.5,540.5 305.93,565.93 332.17,565.93 349.38,548.72 U5.54
  Layer 2 w5.5: v1(190,420) v1(190,490)
NetU1_5: U1.5 U5.53 | length 297.8
  Top Layer w5.5: v1(240,510) 255,510 270,525 270,545 302.06,577.06 343.31,577.06 360.52,559.85 U5.53 ; v1(240,580) U1.5
  Layer 2 w5.5: v1(240,510) v1(240,580)
NetU1_6: U1.6 U5.52 | length 324.6
  Top Layer w5.5: v1(190,530) 190.25,530.25 240.25,530.25 299.5,589.5 353.14,589.5 371.65,570.99 U5.52 ; v1(190,580) U1.6
  Layer 2 w5.5: v1(190,530) v1(190,580)
NetU1_7: U1.7 U5.51 | length 339.8
  Top Layer w5.5: U1.7 140,580 165,555 250,555 295,600 364.91,600 382.79,582.12 U5.51
QSPI_CSn: R11.1 R13.2 U1.1 U5.56 | length 1441.3
  Top Layer w5.5: U1.1 90,425 110,445 v1(215,445) 235,445 321.78,531.78 323.46,531.78 U5.56 ; v1(805,345) 868,345 R11.1
  Layer 1 w5.5: v1(215,445) 175,445 165,435 165,400 100,335 100,283.22 108.22,275 240,275 290,225 710,225 805,320 v1(805,345)
RUN_EXT: R12.1 SOUTH.5 SW2.2 U5.26 | length 980.5
  Top Layer w5.5: U5.26 650.3,451.28 667.51,434.07 699.07,434.07 718.02,453.02 v1@738.02,453.02 ; v1(690,110) SW2.2 ; v1(740,455) 832,547 R12.1
  Layer 2 w5.5: SOUTH.5 540,15 635,110 v1(690,110) 690,366.36 690.25,366.61 690.25,383.39 690,383.64 690,405 v1(740,455)
SWCLK: R9.1 U5.24 | length 147.8
  Top Layer w5.5: U5.24 626.9,429.01 645.91,410 718.89,410 727.77,418.88 732.33,418.88 744.19,407.02 R9.1
SWDIO: R8.1 U5.25 | length 160.6
  Top Layer w5.5: U5.25 657.45,420.5 705.5,420.5 720,435 766.21,435 769.19,432.02 R8.1
USB_EXT_N: NORTH.5 R4.2 | length 249.8
  Top Layer w10: R4.2 398.5,790 387.5,801 387.5,812.21 385.75,813.96 385.75,892.67 428.25,935.17 428.25,961.14 436.74,969.63 440.57,969.63 460,989.06 NORTH.5
USB_EXT_P: NORTH.4 R3.2 | length 249.8
  Top Layer w10: R3.2 356.5,790 367.5,801 367.5,812.21 369.25,813.96 369.25,899.51 411.75,942.01 411.75,961.14 403.26,969.63 399.43,969.63 380,989.06 NORTH.4
XIN: C24.2 U5.20 X1.1 | length 286.9
  Top Layer w6: U5.20 582.12,383.54 599.8,365.86 599.8,290.2 650.82,239.18 650.82,183.5 X1.1 631.12,180.72 C24.2
XOUT: R10.1 U5.21 | length 92
  Top Layer w5.5: U5.21 617.3,371.56 617.3,342.44 627.98,331.77 R10.1
pads on no net: J1.0 U4.1

## Polygon pours and split planes (outlines as drawn)
GND on Top Layer "GND_L01_P019" (solid, remove dead copper, pour order 19): 50,260 0,260 0,340 50,340 50,950 260,950 260,1000 340,1000 340,950 500,950 500,1000 580,1000 580,950 950,950 950,740 1000,740 1000,660 950,660 950,50 740,50 740,0 660,0 660,50 50,50
3V3 on Top Layer "3V3_L01_P014" (solid, remove dead copper, pour order 14): 328.86,278.86 396.31,211.42 396.42,211.42 515,330 447.5,397.5
3V3 on Top Layer "3V3_L01_P012" (solid, remove dead copper, pour order 12): 326.5,695.75 326.5,644.25 345.1,644.25 432.17,557.17 545,670 545,743.5 374.25,743.5
GND on Top Layer "GND_L01_P010" (solid, remove dead copper, pour order 10): 302.34,500 500,302.34 697.66,500 500,697.66
3V3 on Top Layer "3V3_L01_P016" (solid, remove dead copper, pour order 16): 346.89,486.08 305.75,444.94 305.75,410 250,410 250,445 296.65,491.65 341.32,491.65
GND on Layer 1 "GND_L02_P020" (solid, remove dead copper, pour order 20): 340,1000 340,950 500,950 500,1000 580,1000 580,585 260,585 260,1000
3V3 on Layer 1 "3V3_L02_P018" (solid, remove dead copper, pour order 18): 640,880 795,725 795,225 0,225 0,880 325,880 325,715 425,615 455,645 430,670 430,880
1V1 on Layer 1 "1V1_L02_P017" (solid, remove dead copper, pour order 17): 377.5,567.5 500,690 690,500 567.5,377.5
GND on Bottom Layer "GND_L04_P021" (solid, remove dead copper, pour order 21): 50,260 0,260 0,340 50,340 50,950 260,950 260,1000 340,1000 340,950 500,950 500,1000 580,1000 580,950 950,950 950,740 1000,740 1000,660 950,660 950,50 740,50 740,0 660,0 660,50 50,50

## Other copper
Top Layer:
  rectangle net 3V3_EXT: 864.25,800 932.72,868.5

## Silkscreen, mask and mechanical layers (free items; w line width, h text height)
Top Overlay:
  circle w20: c35,965 r5
  text "Osborne / Electrical / Engineering" at 707.5,454.14 h55
  text "BOOT" at 685.43,118.49 h60 r45
  text "RP2040 / ISP STAMP" at 345,64.9 h60
  text "RESET" at 683.74,46.8 h60 r45
Board Shape:
  the board outline again, w6
Route Tool Path:
  lines w50: -25,100 -25,900 ; 100,-25 900,-25 ; 100,1025 900,1025 ; 1025,100 1025,900